# EAGLE board MSP430full (EAGLE 9.3.0)
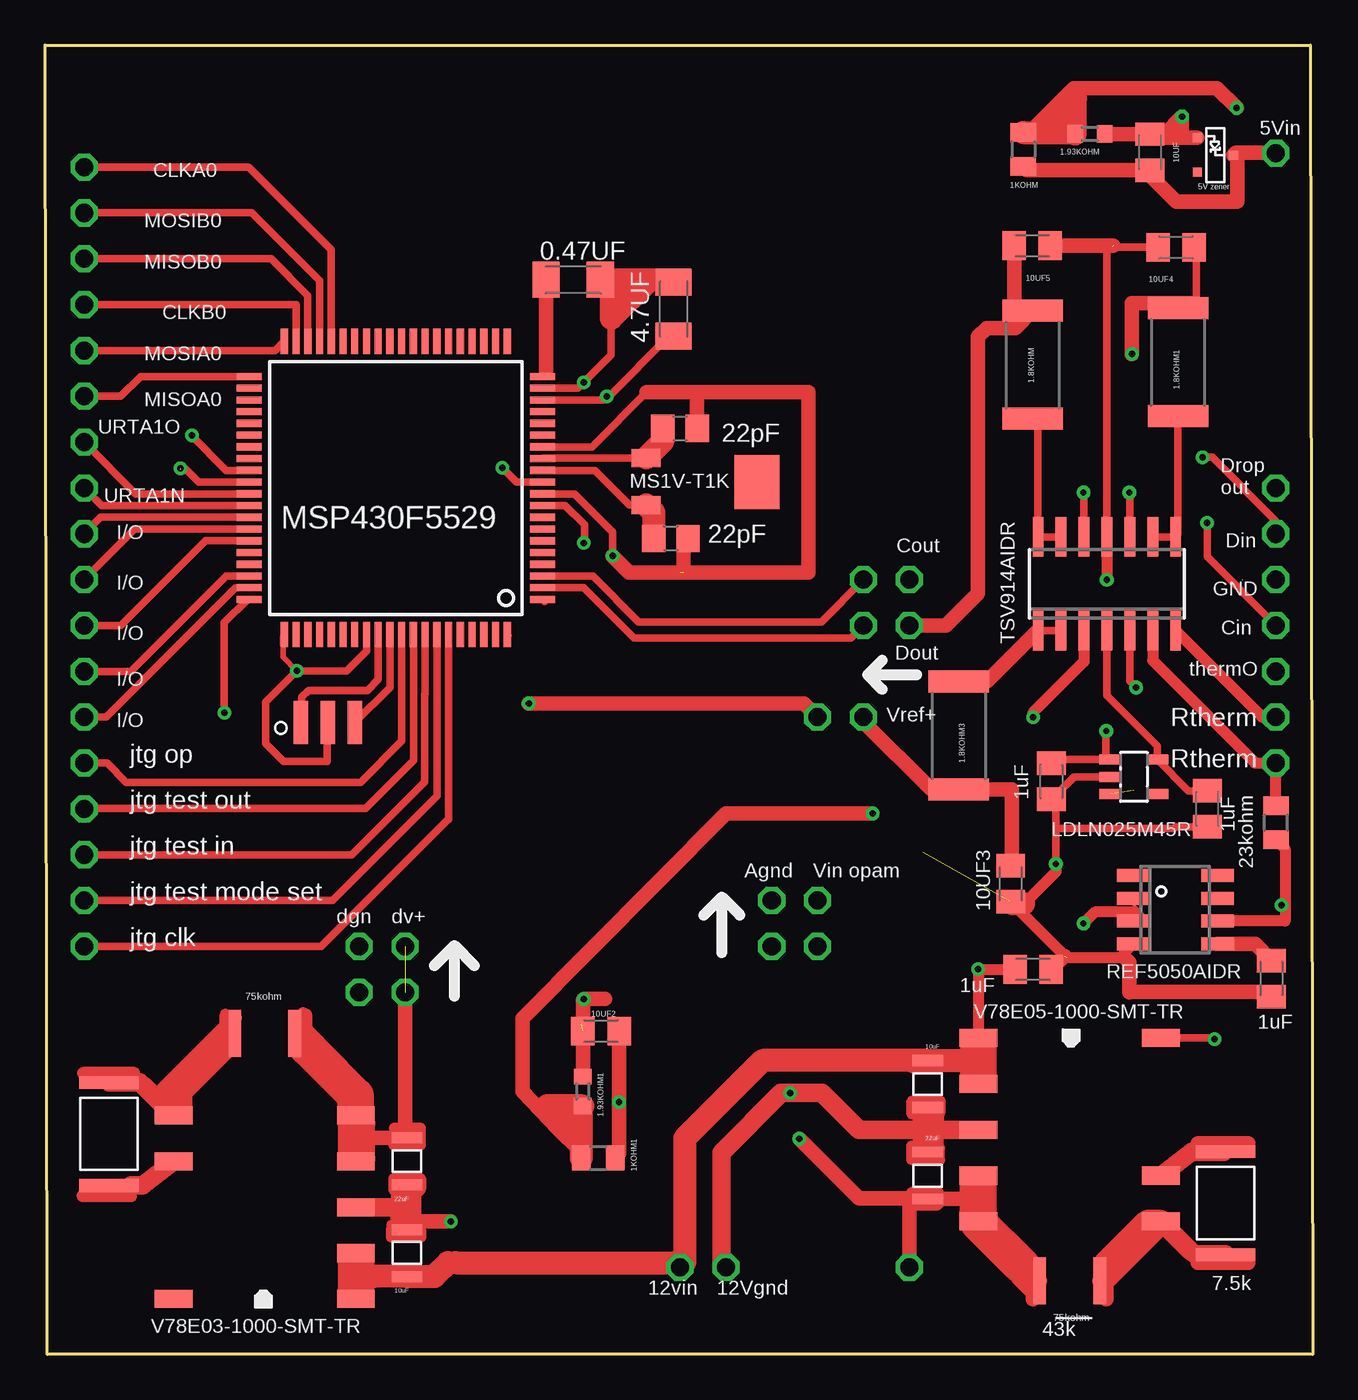
[diagram p0: board, top side]
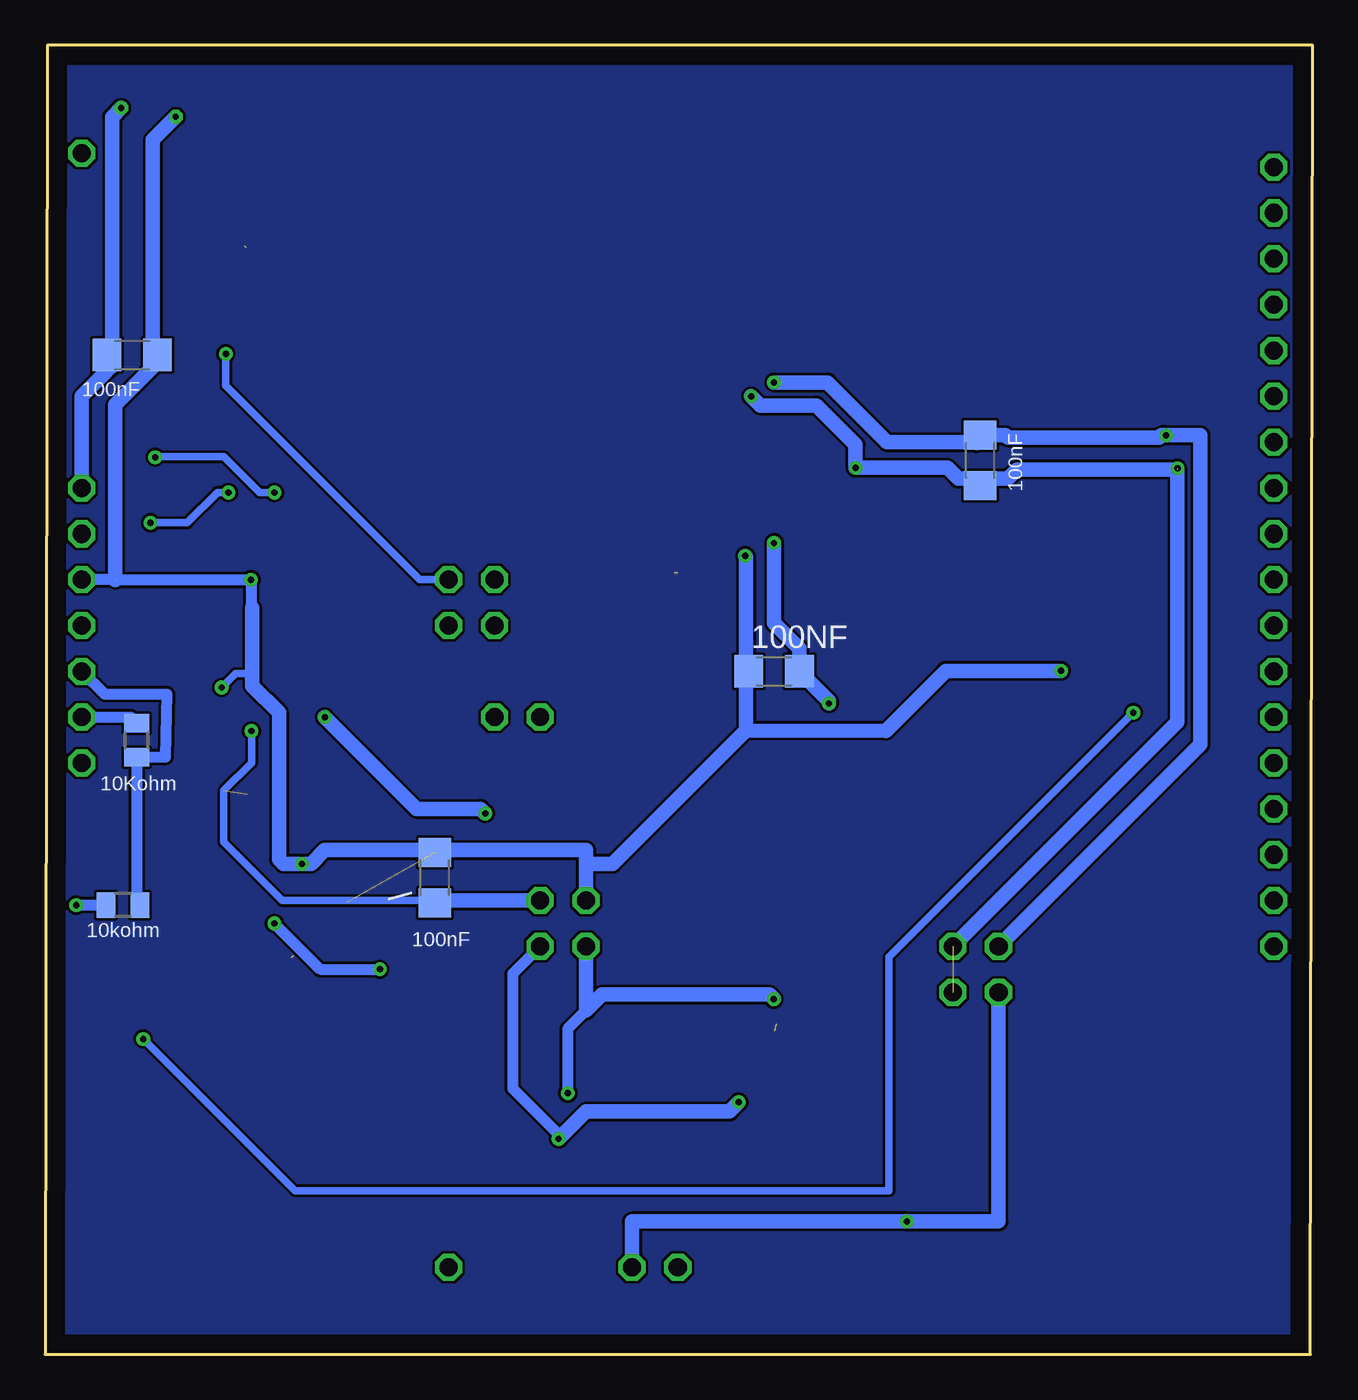
[diagram p1: board, bottom side, seen from below]

Size 70.23 x 72.54 mm. Coordinates in mm from the lower left corner, seen from the top.
Outline: 0,72.54 70.1,72.54 70.23,0 0.13,0 0,72.54
Copper layers (1*16): Top 0.035mm / dielectric 1.5mm / Bottom 0.035mm
Design rules "default": minimum track width 6mil, minimum drill 0.35mm, track to track 6mil, track to pad 6mil, pad to pad 6mil, via to via 6mil, smd to smd 6mil, copper to edge 40mil, drill to drill 6mil, minimum pad ring 10mil, minimum via ring 8mil, stop-mask expansion 4mil, vias tented up to drill 0mil, thermal gap 10mil

## Footprints (pad centres in the part's own frame; a part is rotated, then mirrored left to right if it is on the bottom)
C1206K = smd 1.5 x 2: 1 -1.5,0; 2 1.5,0
R2512 = smd 1.22 x 3.35: 1 -2.99,0; 2 2.99,0
R0603 = smd 0.87 x 0.98: 1 -0.815,0; 2 0.815,0
R0805 = smd 1.02 x 1.4: 1 -0.94,0; 2 0.94,0
C0805K = smd 1.3 x 1.6: 1 -1,0; 2 1,0
C1206 = smd 1.6 x 1.8: 1 -1.4,0; 2 1.4,0
PLVA650A,215 = smd 0.5 x 0.5: 1 -0.95,-2.25; 2 0.95,-2.25; 3 0,-0.25
ESR25JZPF7502 = smd 0.7 x 2.6: P$1 -1.65,-0.01; P$2 1.66,-0.01
CRGP2512F22K = smd 0.7 x 3.3: P$1 2.85,0; P$2 -2.85,0
GRT31CR61H106KE01L = smd 0.6 x 1.7: P$1 -1.3,0; P$2 1.3,0
GRT31CC81C226KE01L = smd 0.6 x 1.7: P$1 -1.3,0; P$2 1.3,0
V78E05-1000-SMT-TR = smd 1 x 2.1: GND_1 2.54,5.05; GND_2 0,-5.05; ON/OFF -5.08,5.05; VADJ 5.08,5.05; VIN_1 -5.08,-5.05; VIN_2 -2.54,-5.05; VOUT_1 2.54,-5.05; VOUT_2 5.08,-5.05
V78E03-1000-SMT-TR = smd 1 x 2.1: GND_1 2.54,5.05; GND_2 0,-5.05; ON/OFF -5.08,5.05; VADJ 5.08,5.05; VIN_1 -5.08,-5.05; VIN_2 -2.54,-5.05; VOUT_1 2.54,-5.05; VOUT_2 5.08,-5.05
MS1V-T1K = smd 2.5 x 3: P$1 -1.24,0.03 | smd 1.6 x 1: P$2 4.9,1.3; P$3 4.9,-1.3
C0805 = smd 1.3 x 1.5: 1 -0.95,0; 2 0.95,0
CSTCR4M00G53U-R0 = smd 0.8 x 2.4: GND 0,0; IN 1.5,0; OUT -1.5,0
SOT23-5 = smd 0.55 x 1.2: 1 -0.95,-1.3; 2 0,-1.3; 3 0.95,-1.3; 4 0.95,1.3; 5 -0.95,1.3
SO08 = smd 0.72 x 1.78: 1 -1.905,-2.35; 2 -0.635,-2.35; 3 0.635,-2.35; 4 1.905,-2.35; 5 1.905,2.35; 6 0.635,2.35; 7 -0.635,2.35; 8 -1.905,2.35
QFP80_SOT496-1 = smd 0.4 x 1.4: 1 -6.175,-8.125; 2 -5.525,-8.125; 3 -4.875,-8.125; 4 -4.225,-8.125; 5 -3.575,-8.125; 6 -2.925,-8.125; 7 -2.275,-8.125; 8 -1.625,-8.125; 9 -0.975,-8.125; 10 -0.325,-8.125; 11 0.325,-8.125; 12 0.975,-8.125; 13 1.625,-8.125; 14 2.275,-8.125; 15 2.925,-8.125; 16 3.575,-8.125; 17 4.225,-8.125; 18 4.875,-8.125; 19 5.525,-8.125; 20 6.175,-8.125; 41 6.175,8.125; 42 5.525,8.125; 43 4.875,8.125; 44 4.225,8.125; 45 3.575,8.125; 46 2.925,8.125; 47 2.275,8.125; 48 1.625,8.125; 49 0.975,8.125; 50 0.325,8.125; 51 -0.325,8.125; 52 -0.975,8.125; 53 -1.625,8.125; 54 -2.275,8.125; 55 -2.925,8.125; 56 -3.575,8.125; 57 -4.225,8.125; 58 -4.875,8.125; 59 -5.525,8.125; 60 -6.175,8.125 | smd 1.4 x 0.4: 21 8.125,-6.175; 22 8.125,-5.525; 23 8.125,-4.875; 24 8.125,-4.225; 25 8.125,-3.575; 26 8.125,-2.925; 27 8.125,-2.275; 28 8.125,-1.625; 29 8.125,-0.975; 30 8.125,-0.325; 31 8.125,0.325; 32 8.125,0.975; 33 8.125,1.625; 34 8.125,2.275; 35 8.125,2.925; 36 8.125,3.575; 37 8.125,4.225; 38 8.125,4.875; 39 8.125,5.525; 40 8.125,6.175; 61 -8.125,6.175; 62 -8.125,5.525; 63 -8.125,4.875; 64 -8.125,4.225; 65 -8.125,3.575; 66 -8.125,2.925; 67 -8.125,2.275; 68 -8.125,1.625; 69 -8.125,0.975; 70 -8.125,0.325; 71 -8.125,-0.325; 72 -8.125,-0.975; 73 -8.125,-1.625; 74 -8.125,-2.275; 75 -8.125,-2.925; 76 -8.125,-3.575; 77 -8.125,-4.225; 78 -8.125,-4.875; 79 -8.125,-5.525; 80 -8.125,-6.175
SO14 = smd 0.6 x 2.2: 1 -3.81,-2.6; 2 -2.54,-2.6; 3 -1.27,-2.6; 4 0,-2.6; 5 1.27,-2.6; 6 2.54,-2.6; 7 3.81,-2.6; 8 3.81,2.6; 9 2.54,2.6; 10 1.27,2.6; 11 0,2.6; 12 -1.27,2.6; 13 -2.54,2.6; 14 -3.81,2.6

## Placement (x,y rotation side)
0.47UF  [C1206K]  29.26,59.54 0 top
1.8KOHM  [R2512]  54.71,54.83 270 top
1.8KOHM1  [R2512]  62.76,54.98 270 top
1.8KOHM3  [R2512]  50.62,34.28 270 top
1.93KOHM  [R0603]  57.89,67.62 180 top
1.93KOHM1  [R0603]  29.79,14.58 270 top
1KOHM  [R0805]  54.19,66.76 270 top
1KOHM1  [R0805]  30.65,10.89 0 top
4.7UF  [C1206K]  34.82,57.91 90 top
10K  [R0805]  65.15,34.04 90 bottom
10UF  [C0805K]  61.22,66.61 270 top
10UF2  [C0805K]  30.8,17.91 0 top
10UF3  [C0805K]  53.5,26.08 90 top
10UF4  [C0805K]  62.65,61.34 0 top
10UF5  [C0805K]  54.69,61.42 180 top
100NF  [C1206]  29.84,37.85 0 bottom
\  [C1206]  48.64,26.42 90 bottom
E$1  [PLVA650A,215]  66.09,66.45 270 top
E$2  [ESR25JZPF7502]  56.77,4.06 180 top
E$3  [CRGP2512F22K]  65.41,8.38 90 top
E$4  [GRT31CR61H106KE01L]  48.89,14.99 90 top
E$5  [GRT31CC81C226KE01L]  48.89,9.91 90 top
E$6  [V78E05-1000-SMT-TR]  56.77,12.45 270 top
E$7  [V78E03-1000-SMT-TR]  12.17,8.15 90 top
E$8  [ESR25JZPF7502]  12.17,17.81 0 top
E$9  [CRGP2512F22K]  3.53,12.22 270 top
E$10  [GRT31CR61H106KE01L]  20.04,5.61 270 top
E$11  [GRT31CC81C226KE01L]  20.04,10.69 270 top
E$12  [MS1V-T1K]  38.2,48.37 180 top
E$13  [C0805]  35.18,51.31 0 top
E$14  [CSTCR4M00G53U-R0]  15.66,35.01 180 top
E$15  [C0805]  34.67,45.21 0 top
E$16  LDLN025M45R (LDO)  [SOT23-5]  60.32,32 270 top
E$17  [C1206]  18.41,49.53 90 bottom
E$18  [R0805]  68.2,29.46 90 top
E$19  [C1206]  65.41,55.37 0 bottom
E$20  [R0805]  65.91,24.89 180 bottom
E$21  1uF  [C0805K]  55.75,31.75 90 top
E$22  1uF  [C0805K]  64.39,30.23 90 top
E$23  [SO08]  62.61,24.64 270 top
E$24  1uF  [C0805K]  67.94,20.83 90 top
E$25  1uF  [C0805K]  54.74,21.34 180 top
MSP430F5529  [QFP80_SOT496-1]  19.43,48.01 90 top
TSV914AIDR  [SO14]  58.83,42.7 0 top

## Library data of the parts
0.47UF 4.7UF 100NF \ E$13 E$15 E$17 E$19 = rcl
1.8KOHM 1.8KOHM1 1.8KOHM3 1.93KOHM 1.93KOHM1 1KOHM 1KOHM1 10K E$18 E$20 = smd-ipc
10UF 10UF2-10UF5 E$21 E$22 E$24 E$25 MSP430F5529 = ref-packages
E$1-E$12 E$14 = Library_Capstone
E$16 TSV914AIDR = analog-devices
E$23 = ir

## Nets
3.3V: 4.7UF.1 E$7.VOUT_1 E$7.VOUT_2 E$8.P$2 E$11.P$1 E$17.1 MSP430F5529.11 MSP430F5529.18 MSP430F5529.50
3.3VREF: 100NF.2 MSP430F5529.9
5V: 1KOHM1.2 10UF2.2 E$2.P$2 E$5.P$1 E$6.VOUT_1 E$6.VOUT_2
5V.: \.1 E$16.1 E$16.3 E$21.2
5V_ON/OFF: E$6.ON/OFF MSP430F5529.60
5VREF: 1.93KOHM1.2 1KOHM1.1 TSV914AIDR.3
12VIN: E$4.P$2 E$6.VIN_1 E$6.VIN_2 E$7.VIN_1 E$7.VIN_2 E$10.P$2 E$23.2 E$25.2
ANG_GND: 1.93KOHM.1 10UF3.1 10UF4.1 10UF5.1 10UF.1 100NF.1 \.2 E$1.1 E$13.2 E$14.GND E$15.2 E$16.2 E$19.2 E$21.1 E$22.1 E$23.4 E$24.1 E$25.1 MSP430F5529.10 MSP430F5529.14 MSP430F5529.61 MSP430F5529.68 TSV914AIDR.5 TSV914AIDR.11
DGT_GND: 0.47UF.2 4.7UF.2 E$17.2 MSP430F5529.19 MSP430F5529.49
GND: 1.93KOHM1.1 10UF2.1 E$4.P$1 E$5.P$2 E$6.GND_2 E$7.GND_2 E$10.P$1 E$11.P$2
S$1: 1.8KOHM.2 TSV914AIDR.13 TSV914AIDR.14
S$2: 1.8KOHM1.2 TSV914AIDR.8 TSV914AIDR.9
S$3: 1.8KOHM.1 10UF5.2
S$5: E$8.P$1
S$6: TSV914AIDR.12
S$7: MSP430F5529.41
S$8: E$14.IN MSP430F5529.69
S$9: 1.8KOHM3.1 TSV914AIDR.1 TSV914AIDR.2
S$10: 10UF4.2
S$11: 1.8KOHM3.2 10UF3.2
S$12: MSP430F5529.59
S$13: 10K.2 TSV914AIDR.7
S$14: E$16.5 E$22.2 TSV914AIDR.4
S$16: E$14.OUT MSP430F5529.70
S$17: 1.93KOHM.2 1KOHM.1 E$19.1
S$18: MSP430F5529.53
S$19: E$7.VADJ E$9.P$2
S$20: 1KOHM.2 10UF.2 E$1.3
S$22: MSP430F5529.58
S$23: MSP430F5529.55
S$24: E$2.P$1 E$3.P$2 E$6.VADJ
S$25: E$3.P$1 E$6.GND_1
S$26: E$7.ON/OFF
S$27: MSP430F5529.52
S$28: MSP430F5529.51
S$29: E$7.GND_1 E$9.P$1
S$30: MSP430F5529.54
S$31: E$18.2 TSV914AIDR.6
S$32: E$18.1 E$20.2 E$23.6
S$33: MSP430F5529.40
S$34: MSP430F5529.39
S$35: MSP430F5529.38
S$36: MSP430F5529.37
S$37: MSP430F5529.36
S$38: 0.47UF.1 MSP430F5529.20
S$39: 10K.1 E$20.1
S$40: MSP430F5529.2
S$41: MSP430F5529.3
S$42: MSP430F5529.1
S$43: MSP430F5529.80
S$44: MSP430F5529.79
S$47: MSP430F5529.75
S$48: MSP430F5529.74
S$49: MSP430F5529.73
S$50: MSP430F5529.72
S$55: MSP430F5529.71
S$56: TSV914AIDR.10
S$58: E$12.P$3 E$13.1 MSP430F5529.13
S$59: E$12.P$2 E$15.1 MSP430F5529.12
S$61: E$23.5 E$24.2
S$62: 1.8KOHM1.1

## Tracks (layer width: path | path; a pad name or v marks a point on that pad's centre or on a via)
3.3V  (via drill 0.35, 1)  (2 unrouted)
  Top 0.152: 17.2,13.34 17.22,13.31 E$7.VOUT_2 16.96,12.98 16.74,12.98 | 16.74,10.69 E$7.VOUT_1 17.6,10.84 17.6,11.99 | E$11.P$1 20.77,11.99 | 4.7UF.1 34.57,56.41 | v31.11,53.09 31.18,53.02
  Top 0.406: 14.26,18.47 14.28,18.37 14.48,17.23 14.52,17.01 | MSP430F5529.50 8.51,48.33 7.75,49.09 v7.49,49.09 | MSP430F5529.18 30.91,52.88 v31.11,53.09 | 34.57,56.41 31.18,53.02 | MSP430F5529.11 26.12,48.33 v25.32,49.12
  Top 0.61: E$8.P$2 13.83,18.48 14.28,18.93 14.28,18.85 | 14.27,18.85 14.28,18.85 | 14.28,18.85 14.28,18.64 14.48,18.85 14.48,17.23 | 19.33,11.99 19.33,11.58 20.78,11.58 20.78,12.55 19.35,12.55 19.91,11.99 E$11.P$1
  Top 0.813: 19.33,11.99 17.6,11.99 | E$11.P$1 19.94,12.09 v19.94,20.07
  Top 1.016: 16.74,10.69 16.74,12.98
  Top 1.27: 17.65,10.85 17.65,12.8 E$7.VOUT_2
  Top 2.032: 14.52,17.01 17.2,14.33 17.2,13.34
  Bottom 0.406: v7.49,49.09 7.56,49.02
  Bottom 0.813: v19.94,22.61 7.49,35.05 7.49,49.02 | 18.41,48.51 19.63,48.51 20.24,49.12 v25.32,49.12 25.32,50.41 27.49,52.58 30.61,52.58 v31.11,53.09 | 7.56,49.02 16.38,49.02 16.89,48.51 18.41,48.51 | E$17.1 18.41,48.51
3.3VREF  (via drill 0.35, 1)
  Top 0.406: v29.84,44.96 29.88,44.99 29.88,45.97 28.82,47.03 MSP430F5529.9
  Top 0.813: v42.8,35.31 42.04,36.07 v26.8,36.07
  Bottom 0.813: v29.84,44.96 29.84,40.52 28.44,39.12 100NF.2 26.8,36.2 v26.8,36.07
5V  (via drill 0.35, 1)
  Top 0.152: 55.06,4.07 E$2.P$2 54.95,4.23 54.71,4.23 | 51.33,8.61 51.33,9.76 E$6.VOUT_1 52.2,9.91 | 51.74,7.26 51.72,7.28 E$6.VOUT_2 51.97,7.62 52.2,7.62
  Top 0.406: 10UF2.2 32.07,17.91 | 54.71,4.23 54.59,4.9
  Top 0.61: 47.98,8.64 47.88,8.64 46.35,8.64 | 47.98,8.64 48.01,8.61 48.01,8.28 49.43,8.28 49.76,8.61 | 47.98,8.64 48.39,8.64 48.86,8.64 E$5.P$1 48.53,8.97 | 49.5,8.94 49.48,8.97 48.53,8.97 | 48.53,8.97 48.01,8.97
  Top 0.813: 1KOHM1.2 31.8,11.1 v31.8,13.97 10UF2.2 | v41.78,11.94 45.09,8.64 47.88,8.64 | 52.49,5.65 53.53,4.61 54.57,4.61 E$2.P$2 54.74,3.7 54.74,3.05 | 53.91,4.23 54.57,3.58 55.06,4.07 | 47.88,8.64 48.39,8.64 | E$5.P$1 49.76,8.61 51.33,8.61 | 47.88,8.64 v47.88,4.83
  Top 1.016: 54.11,4.9 54.59,4.9 | 52.2,9.91 52.2,7.62
  Top 1.27: 51.28,9.75 51.28,7.8 E$6.VOUT_2
  Top 2.032: 54.11,4.9 51.74,7.26
  Bottom 0.61: v42.8,22.61 44.32,21.08 44.32,14.73 41.78,12.19 41.78,12 | 41.78,12 41.75,11.97 | 41.78,12 v41.78,11.94
  Bottom 0.813: v31.8,13.97 32.31,13.46 40.26,13.46 41.75,11.97
5V.  (via drill 0.35, 1)  (1 unrouted)
  Top 0.406: v58.8,34.54 58.77,34.51 58.77,33.21 E$16.1 55.96,32.95 E$21.2
  Bottom 0.406: 48.64,25.15 57.08,25.15 60.32,28.39 60.32,31.24 58.8,32.77 v58.8,34.54
  Bottom 0.813: v42.8,25.15 48.64,25.15 \.1
5V_ON/OFF  (via drill 0.35)
  Top 0.406: MSP430F5529.60 11.22,41.83 9.93,40.54 v9.93,35.56 | v64.8,17.48 64.75,17.53 E$6.ON/OFF
  Bottom 0.406: v9.93,35.56 23.47,22.02 23.47,9.07 56.39,9.07 v64.8,17.48
5VREF  (via drill 0.35)
  Top 0.406: 1KOHM1.1 29.71,11.23 | 29.71,13.69 1.93KOHM1.2
  Top 0.61: 29.06,12.53 28.41,12.53 | TSV914AIDR.3 57.56,38.38 54.74,35.56 v54.74,35.31
  Top 0.813: 29.71,13.69 29.71,11.23 28.41,12.53 26.46,14.56 26.46,18.63 37.72,29.97 v45.85,29.97
  Top 1.27: 1KOHM1.1 29.71,13.69 | 1.93KOHM1.2 27.83,13.77 | 27.83,13.77 27.81,13.78 | 27.83,13.77 29.06,12.53
  Bottom 0.813: v54.74,35.31 49.66,30.23 46.1,30.23 v45.85,29.97
12VIN  (via drill 0.35, 1)
  Top 0.152: E$7.VIN_2 17.1,5.5 16.6,5.5 16.48,5.61 | E$7.VIN_1 16.48,3.07 | 18.2,4.31 17.47,3.58 | E$6.VIN_2 51.83,15.1 52.34,15.1 52.45,14.99 | E$6.VIN_1 52.45,17.53 | 50.73,16.29 51.46,17.02 | E$23.2 60.26,24.96 60.83,24.38 60.2,24.38 60.07,24.51
  Top 0.203: E$7.VIN_1 17.22,3.33 17.47,3.58 | E$7.VIN_2 17.22,5.1 17.47,5.1 | E$6.VIN_1 51.72,17.27 51.46,17.02 | E$6.VIN_2 51.72,15.49 51.46,15.49
  Top 0.508: 16.48,3.07 16.48,5.61 | 52.45,17.53 52.45,14.99
  Top 0.61: 50.67,16.29 51.46,15.49 | 34.92,5.08 v35.18,4.83 | 47.93,16.29 47.93,15.98 48.03,15.88 49.42,15.88 49.84,16.29 | 60.3,24.51 60.07,24.51 58.17,24.51 v57.53,23.88 | 51.72,17.27 51.72,21.31 v51.69,21.34 E$25.2
  Top 0.813: 22.33,5.08 22.73,5.08
  Top 1.27: 18.2,4.31 E$10.P$2 21.56,4.31 22.33,5.08 | E$4.P$2 49.84,16.29 50.67,16.29 | E$4.P$2 47.93,16.29 | E$4.P$2 39.75,16.29 35.43,11.97 35.43,5.08 v35.18,4.83 | 22.73,5.08 34.92,5.08
  Top 1.524: 17.47,3.58 17.47,5.1 | 51.46,17.02 51.46,15.49
  Bottom 0.61: v57.53,23.88 54.99,21.34 v51.69,21.34
ANG_GND  (via drill 0.35, 1)  (5 unrouted)
  Top 0.152: 56.49,22.09 56.49,22.22
  Top 0.305: MSP430F5529.61 13.15,39.77 13.15,39.31 13.18,39.27 13.18,38.63 v13.94,37.87
  Top 0.406: 33.33,53.31 30.3,50.28 MSP430F5529.14 | MSP430F5529.10 29.33,47.68 31.44,45.57 v31.44,44.25 31.44,44.23 | 10UF4.1 59.11,61.34 59,61.22 58.83,61.4 TSV914AIDR.11 | 61.21,67.62 10UF.1 | E$21.1 57.01,32 E$16.2 57.02,32 56.01,30.99 56.01,29.15 | 56.01,29.15 62.54,29.15 62.61,29.23 E$22.1 | v56.01,27.18 56.01,29.15 | E$14.GND 15.64,34.99 15.64,32.84 13.22,32.84 12.22,33.85 12.22,36.14 v13.94,37.87 16.7,37.87 17.81,38.97 MSP430F5529.68 | v60.45,36.95 60.1,37.3 TSV914AIDR.5
  Top 0.61: v56.01,27.18 56.01,26.74 54.23,24.96 | TSV914AIDR.11 v58.83,42.92 | E$23.4 59.82,22.29 59.82,21.97 56.6,21.97 10UF3.1
  Top 0.813: 36.13,53.31 42.29,53.31 42.29,43.31 35.37,43.31 35.37,44.96 E$15.2 | 35.18,43.31 32.36,43.31 31.44,44.23 | 59.2,61.42 10UF5.1 | E$13.2 36.13,53.31 | 61.62,67.69 61.91,67.4 E$1.1 62.99,67.4 v62.99,68.57 62.03,67.61 10UF.1 | 1.93KOHM.1 61.21,67.62 | E$24.1 67.69,20.08 60.09,20.08 60.07,20.07 60.07,21.72 59.82,21.97 | E$25.1 56.49,22.09 | 33.33,53.31 36.13,53.31
  Top 1.27: 54.23,24.96 53.61,24.96 10UF3.1
  Bottom 0.406: v58.83,42.92 58.81,42.91 | v60.45,36.95 59.68,37.71 58.75,37.71
  Bottom 0.61: 58.81,42.91 66.34,42.91 | v58.83,42.92 58.83,41.42 58.75,41.34 | 66.34,42.93 v68.2,42.93
  Bottom 0.813: v31.44,44.25 31.39,44.2 31.39,37.85 | 31.39,37.85 31.39,34.56 | 40.26,27.18 38.78,27.18 31.39,34.56 | 58.75,41.34 58.75,37.71 58.75,37.05 57.28,35.57 57.28,27.43 57.02,27.18 v56.01,27.18 55.5,27.18 54.74,27.94 40.26,27.94 40.26,27.18 | v40.26,25.15 40.26,27.18 | 100NF.1 31.39,37.85 | v62.99,68.57 64.26,67.3 64.26,55.37 | E$19.2 64.26,55.37 | 64.26,55.37 64.26,54.7 66.34,52.62 66.34,42.91 | 31.39,34.56 23.66,34.54 20.33,37.87 v13.94,37.87
DGT_GND  (via drill 0.35, 1)
  Top 0.152: 8,51.05 v8.13,50.93 | 4.7UF.2 33.38,59.41
  Top 0.406: MSP430F5529.49 10.04,48.98 8.09,50.93 v8.13,50.93 | MSP430F5529.19 29.53,53.53 v29.84,53.85 31.37,55.37 31.37,57.4 | 4.7UF.2 34.65,59.41 34.57,59.34 34.57,59.54
  Top 1.27: 34.57,59.54 0.47UF.2 31.37,59.54 31.37,57.4 33.38,59.41
  Bottom 0.813: v17.4,22.61 6.22,33.78 6.22,50.93 v8.13,50.93 8.38,50.93 8.51,50.8 16.89,50.8 17.02,50.93 E$17.2 18.41,50.68 18.61,50.48 18.67,50.55 23.58,50.55 26.88,53.85 v29.84,53.85
GND  (via drill 0.35, 1)  (1 unrouted)
  Top 0.152: E$10.P$1 19.76,6.91 19.53,7.14 | E$11.P$2 19.82,9.17 19.53,9.17 | E$5.P$2 48.89,11.46 48.59,11.59 | 49.12,11.43 49.4,11.43
  Top 0.203: E$10.P$1 20.34,7.22 | E$4.P$1 48.59,13.38 | 48.59,12.87 48.16,12.45
  Top 0.406: 29.79,17.9 10UF2.1
  Top 0.61: E$11.P$2 19.77,9.12 19.33,9.12 19.33,9.75 20.8,9.75 20.8,9.14 20.34,8.68 | 19.45,6.91 E$10.P$1 20.12,6.83 20.83,6.83 20.83,6.5 19.18,6.5 19.18,6.91 19.17,6.91 19.45,6.91 | 19.45,6.91 19.2,7.16 | E$5.P$2 48.57,11.53 48.01,11.53 48.01,10.9 48.03,10.87 48.03,10.82 48.01,10.8 49.53,10.8 49.55,10.77 49.55,11.43 49.15,11.43 | E$4.P$1 48.52,13.31 48.03,13.31 48.03,14.05 49.58,14.05 49.58,13.44 49.4,13.26 | 49.2,11.48 49.15,11.43 | 49.15,11.43 49.12,11.43
  Top 0.762: 19.53,7.14 19.53,8.15 19.53,9.17 | 49.4,11.43 49.4,12.45 49.4,13.26
  Top 0.813: 19.53,8.15 20.32,7.37 v22.48,7.37 | 29.75,18.35 29.72,18.31 | 1.93KOHM1.1 29.79,17.9 | 10UF2.1 29.8,19.63 v29.85,19.68 31.02,19.68
  Top 1.016: 20.34,8.68 20.34,7.22 | 19.53,8.15 E$7.GND_2 | v37.72,4.83 37.46,5.08 37.46,11.18 40.77,14.48 v41.27,14.48 43.05,14.48 45.09,12.45 48.16,12.45 | 48.59,13.38 48.59,12.87 48.59,11.59 | 49.4,12.45 E$6.GND_2
  Bottom 0.61: 40.26,19.05 41.27,18.03 v41.27,14.48
  Bottom 0.813: v17.4,20.07 17.4,7.37 v22.48,7.37 37.72,7.37 v37.72,4.83 | v29.85,19.68 30.11,19.94 39.37,19.94 40.26,19.05 v40.26,22.61
GND_PLANE
  pour Bottom: 0.63,72.14 69.98,72.14 69.98,0.25 0.63,0.25
S$1
  Top 0.406: 1.8KOHM.2 55.02,51.53 TSV914AIDR.14 TSV914AIDR.13
S$2
  Top 0.406: 1.8KOHM1.2 62.76,45.42 TSV914AIDR.8 TSV914AIDR.9
S$3  (via drill 1)
  Top 0.406: 1.8KOHM.1 56.13,57.82
  Top 0.813: 10UF5.2 53.69,57.82 1.8KOHM.1 53.76,56.87 52.17,56.87 51.69,56.39 51.69,42.16 49.91,40.39 v47.88,40.39
S$5
  Top 0.61: E$8.P$1 9.98,18.33 9.98,18.85
S$6  (via drill 0.35, 1)
  Top 0.406: TSV914AIDR.12 57.56,47.73 v57.53,47.75 | v64.13,49.71 64.67,49.71 68.2,46.18 v68.2,45.47
  Bottom 0.406: v57.53,47.75 58.35,47.75 60.33,49.73 64.11,49.73 v64.13,49.71
S$7  (via drill 1)
  Top 0.406: MSP430F5529.41 5.29,54.18 4.19,53.09 v2.16,53.09
S$8
  Top 0.406: E$14.IN 14.22,35.07 14.22,36.42 14.59,36.8 17.86,36.8 18.46,37.39 MSP430F5529.69
S$9
  Top 0.406: TSV914AIDR.2 55.27,40.1 55.02,39.84 TSV914AIDR.1
  Top 0.813: 1.8KOHM3.1 52.19,37.27 TSV914AIDR.1
S$10  (via drill 0.35, 1)
  Top 0.406: 10UF4.2 63.78,61.21 63.78,58.25
  Top 0.813: v60.22,55.43 60.22,58.25 63.78,58.25
  Bottom 0.406: v60.22,55.43 60.22,53.67 49.48,42.93 v47.88,42.93
S$11  (via drill 1)
  Top 0.406: 53.57,27.21 53.5,27.21 10UF3.2
  Top 0.813: 53.57,27.21 53.57,31.29 1.8KOHM3.2 49.1,31.29 45.34,35.05 v45.34,35.31
S$12  (via drill 1)
  Top 0.152: 11.31,42.34 10.72,42.34 10.86,42.48 11.1,42.48 | MSP430F5529.59 11.1,42.48 | 10.54,42.47 11.09,42.47 11.1,42.48
  Top 0.406: v2.16,35.31 3.38,35.31 10.54,42.47
S$13  (via drill 1)
  Top 0.406: 62.76,39.97 TSV914AIDR.7
  Top 0.61: TSV914AIDR.7 67.43,35.31 v68.2,35.31
  Bottom 0.61: v68.2,35.31 65.48,35.31 10K.2
S$14
  Top 0.406: TSV914AIDR.4 58.83,36.52 61.62,33.72 E$16.5 63.35,31.23 E$22.2
S$16
  Top 0.406: E$14.OUT 19.11,36.95 MSP430F5529.70
S$17  (via drill 0.35, 1)
  Top 0.406: 1KOHM.1 54.53,67.7 | 56.99,67.7 1.93KOHM.2
  Top 0.61: 55.84,68.34 55.84,69
  Top 0.813: 56.99,67.7 54.53,67.7 55.84,69 56.99,70.16 64.92,70.16 v66.02,69.06
  Top 1.27: 1KOHM.1 56.99,67.7 | 1.93KOHM.2 57.07,69.58 | 57.07,69.58 57.09,69.6 | 57.07,69.58 55.84,68.34
  Bottom 0.813: v66.02,69.06 66.52,68.56 66.52,55.88 66.8,55.6 E$19.1 66.8,54.48 | 66.52,56.13 66.52,54.76 66.8,54.48 | v68.2,48.01 68.2,53.09 66.8,54.48
S$18  (via drill 1)
  Top 0.406: MSP430F5529.53 3.07,46.38 v2.16,45.47
S$19
  Top 0.152: 3.54,15.06 E$9.P$2 | 5.24,15.06 5.44,14.91
  Top 0.61: E$9.P$2 4.4,15.07 4.95,15.62 2.11,15.62 2.08,15.6 2.61,15.07 E$9.P$2
  Top 0.813: E$7.VADJ 7.55,13.66 7.75,13.66 7.75,14.48 7.6,14.62
  Top 1.016: 5.24,15.06 3.54,15.06 | 5.44,14.91 6.66,13.69
  Top 1.27: 6.66,13.69 7.6,14.62 10.24,17.26
S$20
  Top 0.406: 54.41,65.61 1KOHM.2 | 10UF.2 61.22,65.34
  Top 0.813: 10UF.2 54.41,65.61 | 61.22,65.34 62.69,63.87 66.05,63.87 66.05,66.48 65.96,66.57 | 68.17,66.57 65.96,66.57 | E$1.3 65.96,66.57
S$21  (via drill 1)
  other vias: 68.2,66.55
S$22  (via drill 1)
  Top 0.406: v2.16,37.85 4.75,37.85 10.04,43.13 MSP430F5529.58
S$23  (via drill 1)
  Top 0.406: v2.16,40.39 4.19,40.39 8.89,45.08 MSP430F5529.55
S$24
  Top 0.152: 65.39,5.54 E$3.P$2 | 63.69,5.54 63.49,5.69 | E$6.VADJ 61.82,6.96 | 58.7,3.84 58.37,3.84 58.37,4.79 58.5,4.92
  Top 0.254: 58.74,5.06 59.22,4.58 58.93,4.58 E$2.P$1
  Top 0.813: 61.82,6.96 58.7,3.84 | E$2.P$1 58.8,3.69 58.8,3.05 | E$3.P$2 64.33,5.53 63.88,5.08 66.67,5.08 66.67,5.33
  Top 1.016: 63.69,5.54 65.39,5.54 | 63.49,5.69 E$6.VADJ
  Top 1.27: E$6.VADJ 61.05,7.37 58.74,5.06
S$25
  Top 0.152: 65.32,11.23 E$3.P$1
  Top 0.813: E$3.P$1 64.33,11.23 63.88,11.68 66.67,11.68
  Top 1.016: 65.32,11.23 63.53,11.23 E$6.GND_1
S$27  (via drill 1)
  Top 0.406: MSP430F5529.52 3.13,47.03 v2.16,48.01
S$28  (via drill 1)
  Top 0.406: MSP430F5529.51 5.02,47.68 v2.16,50.55
S$29
  Top 0.61: E$9.P$1 4.77,9.37 | E$9.P$1 4.14,9.37 4.77,8.74 2.08,8.74 2.03,8.79 2.61,9.37 E$9.P$1
  Top 1.016: 4.77,9.37 5.41,9.37 E$7.GND_1
S$30  (via drill 1)
  Top 0.406: MSP430F5529.54 4.96,45.73 v2.16,42.93
S$31  (via drill 1)
  Top 0.61: TSV914AIDR.6 61.37,38.45 67.05,32.77 v68.2,32.77 E$18.2
S$32  (via drill 0.35)
  Top 0.61: E$23.6 68.71,24 68.71,24.89 | E$18.1 68.71,28.02 68.71,24.89 | 68.71,24.89 v68.51,24.89
  Bottom 0.61: v68.51,24.89 E$20.2
S$33  (via drill 1)
  Top 0.406: v2.16,55.63 12.75,55.63 MSP430F5529.40
S$34  (via drill 1)
  Top 0.406: v2.16,58.17 13.91,58.17 MSP430F5529.39
S$35  (via drill 1)
  Top 0.406: MSP430F5529.38 14.56,58.67 12.52,60.71 v2.16,60.71
S$36  (via drill 1)
  Top 0.406: v2.16,63.25 11.44,63.25 15.21,59.48 MSP430F5529.37
S$37  (via drill 1)
  Top 0.406: v2.16,65.79 11.28,65.79 15.86,61.21 MSP430F5529.36
S$38
  Top 0.406: MSP430F5529.20 27.76,54.39
  Top 0.813: 0.47UF.1 27.76,54.39
S$39  (via drill 1)
  Bottom 0.61: E$20.1 65.15,25.07 10K.1 63.55,33.1 63.47,36.58 66.93,36.58 v68.2,37.85
S$40  (via drill 1)
  Top 0.406: v45.34,40.39 44.64,39.69 32.64,39.69 29.84,42.48 MSP430F5529.2
S$41  (via drill 1)
  Top 0.406: v45.34,42.93 43,40.59 32.89,40.59 30.35,43.13 MSP430F5529.3
S$42
  Top 0.406: MSP430F5529.1 27.67,41.72
S$43
  Top 0.406: MSP430F5529.80 25.66,39.83
S$46
  Top 0.152: 10.61,16.79 10.49,16.91 10.49,18.64 | 6.53,13.21 6.53,14.69
  Top 0.813: 6.53,14.69 10.49,18.64
S$47  (via drill 1)
  Top 0.406: MSP430F5529.75 22.36,29.64 22.35,29.65 15.3,22.61 v2.16,22.61
S$48  (via drill 1)
  Top 0.406: MSP430F5529.74 21.71,39.98 21.72,39.99 21.72,30.94 15.92,25.15 v2.16,25.15
S$49  (via drill 1)
  Top 0.152: 2.18,27.69 v2.16,27.69 | 21.06,36.6 21.03,36.58
  Top 0.406: MSP430F5529.73 21.06,36.6 | 21.03,36.58 21.03,31.72 16.99,27.69 2.18,27.69
S$50  (via drill 1)
  Top 0.152: 2.18,30.25 v2.16,30.23
  Top 0.406: 2.18,30.25 17.76,30.25 20.41,32.89 MSP430F5529.72
S$55  (via drill 1)
  Top 0.406: v2.16,32.77 3.43,32.77 4.5,31.7 17.48,31.7 19.76,33.98 MSP430F5529.71
S$56  (via drill 0.35, 1)
  Top 0.406: v64.39,46.08 64.39,44.2 v68.2,40.39 | v60.07,47.75 60.1,47.73 TSV914AIDR.10
  Bottom 0.406: v64.39,46.08 62.36,46.08 60.68,47.75 v60.07,47.75
S$57
  Top 0.152: 13.57,18.04 14.12,18.04
  Top 0.813: 14.12,18.04 15.53,16.62
S$58
  Top 0.406: E$12.P$3 27.59,49.67 MSP430F5529.13
  Top 1.27: E$13.1 34.23,50.6 E$12.P$3
S$59
  Top 0.406: E$12.P$2 32.37,47.07 30.48,48.96 27.58,48.96 MSP430F5529.12
  Top 1.27: E$12.P$2 33.72,46.65 E$15.1
S$60
  Top 0.813: 13.85,18.56 16.47,15.94
S$61
  Top 0.813: E$23.5 67.04,22.73 E$24.2

## Text on the board
Top: USB, CHECKED, ANY OTHER PINS PULLED
tPlace: 1uF
tNames: 5Vin | CLKA0 | MOSIB0 | MISOB0 | CLKB0 | MOSIA0 | MISOA0 | URTA1O | 22pF | URTA1N | MS1V-T1K | Drop / out | I/O | 22pF | Cout | Din | I/O | GND | I/O | TSV914AIDR | Cin | Dout | I/O | thermO | I/O | Vref+ | Rtherm | jtg op | Rtherm | jtg test out | 1uF | LDLN025M45R | 1uF | jtg test in | Agnd | Vin opam | 23kohm | jtg test mode set | dgn | dv+ | jtg clk | REF5050AIDR | 1uF | 12vin | 12Vgnd | 7.5k | __ | 43k
bNames: 100nF | 100nF | 10Kohm | 10kohm | 100nF
Document: + | V- | outD | -inD | +inD | +inC | -inC | outC | -inB | outA | -inA | +inA | V+ | +inB | outB | +
Reference: CSTCR4M00G53U-R0